# EAGLE board MM-Qwiic-Carrier-2x1-Panel (EAGLE 9.6.2), part 1 of 2
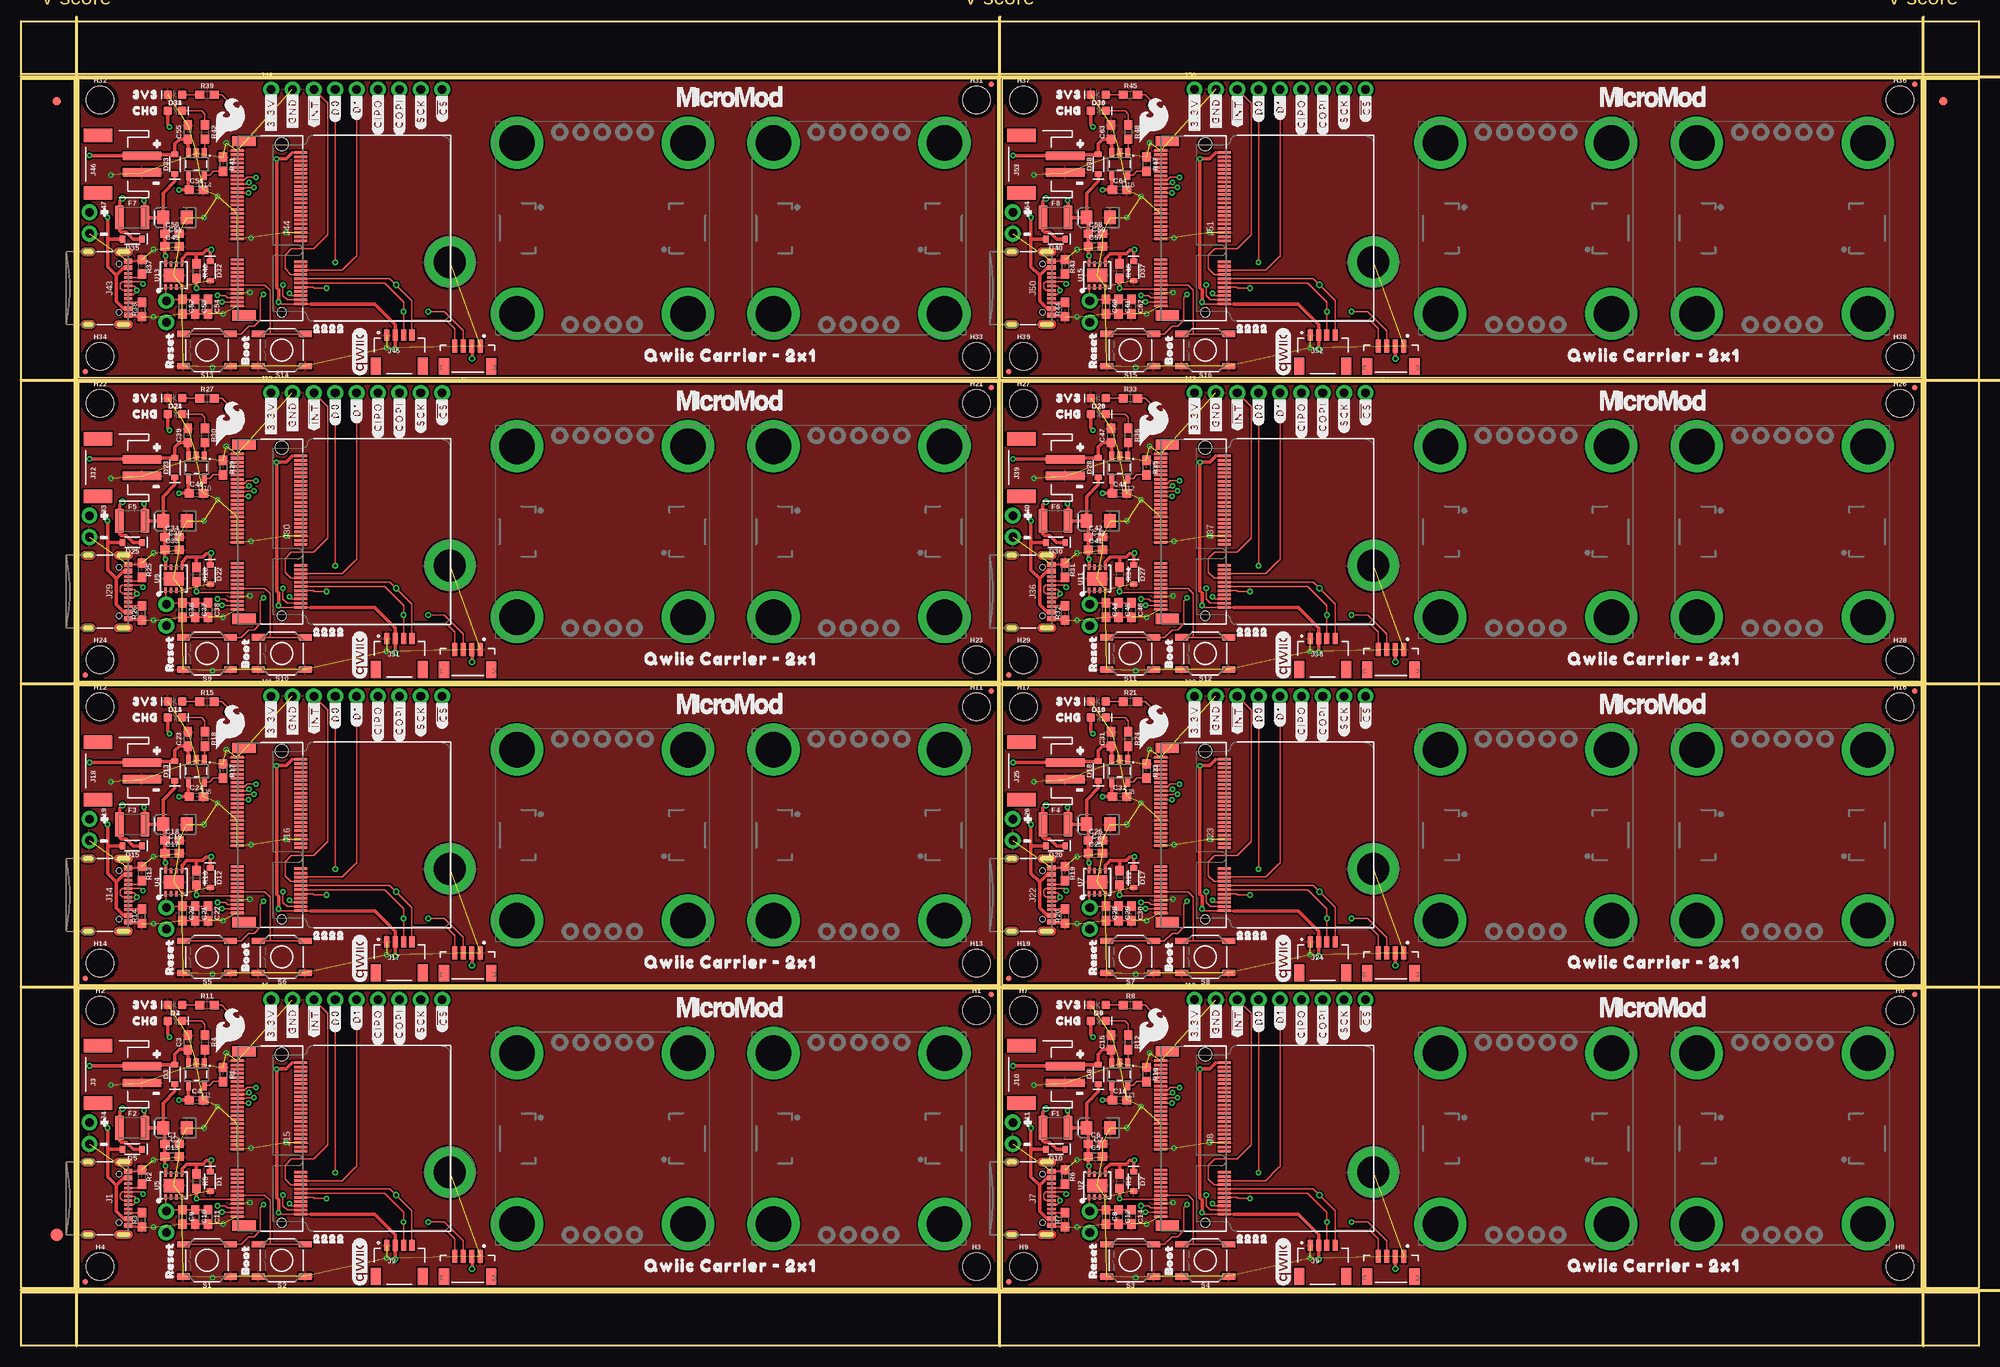
[diagram p0: board, top side]
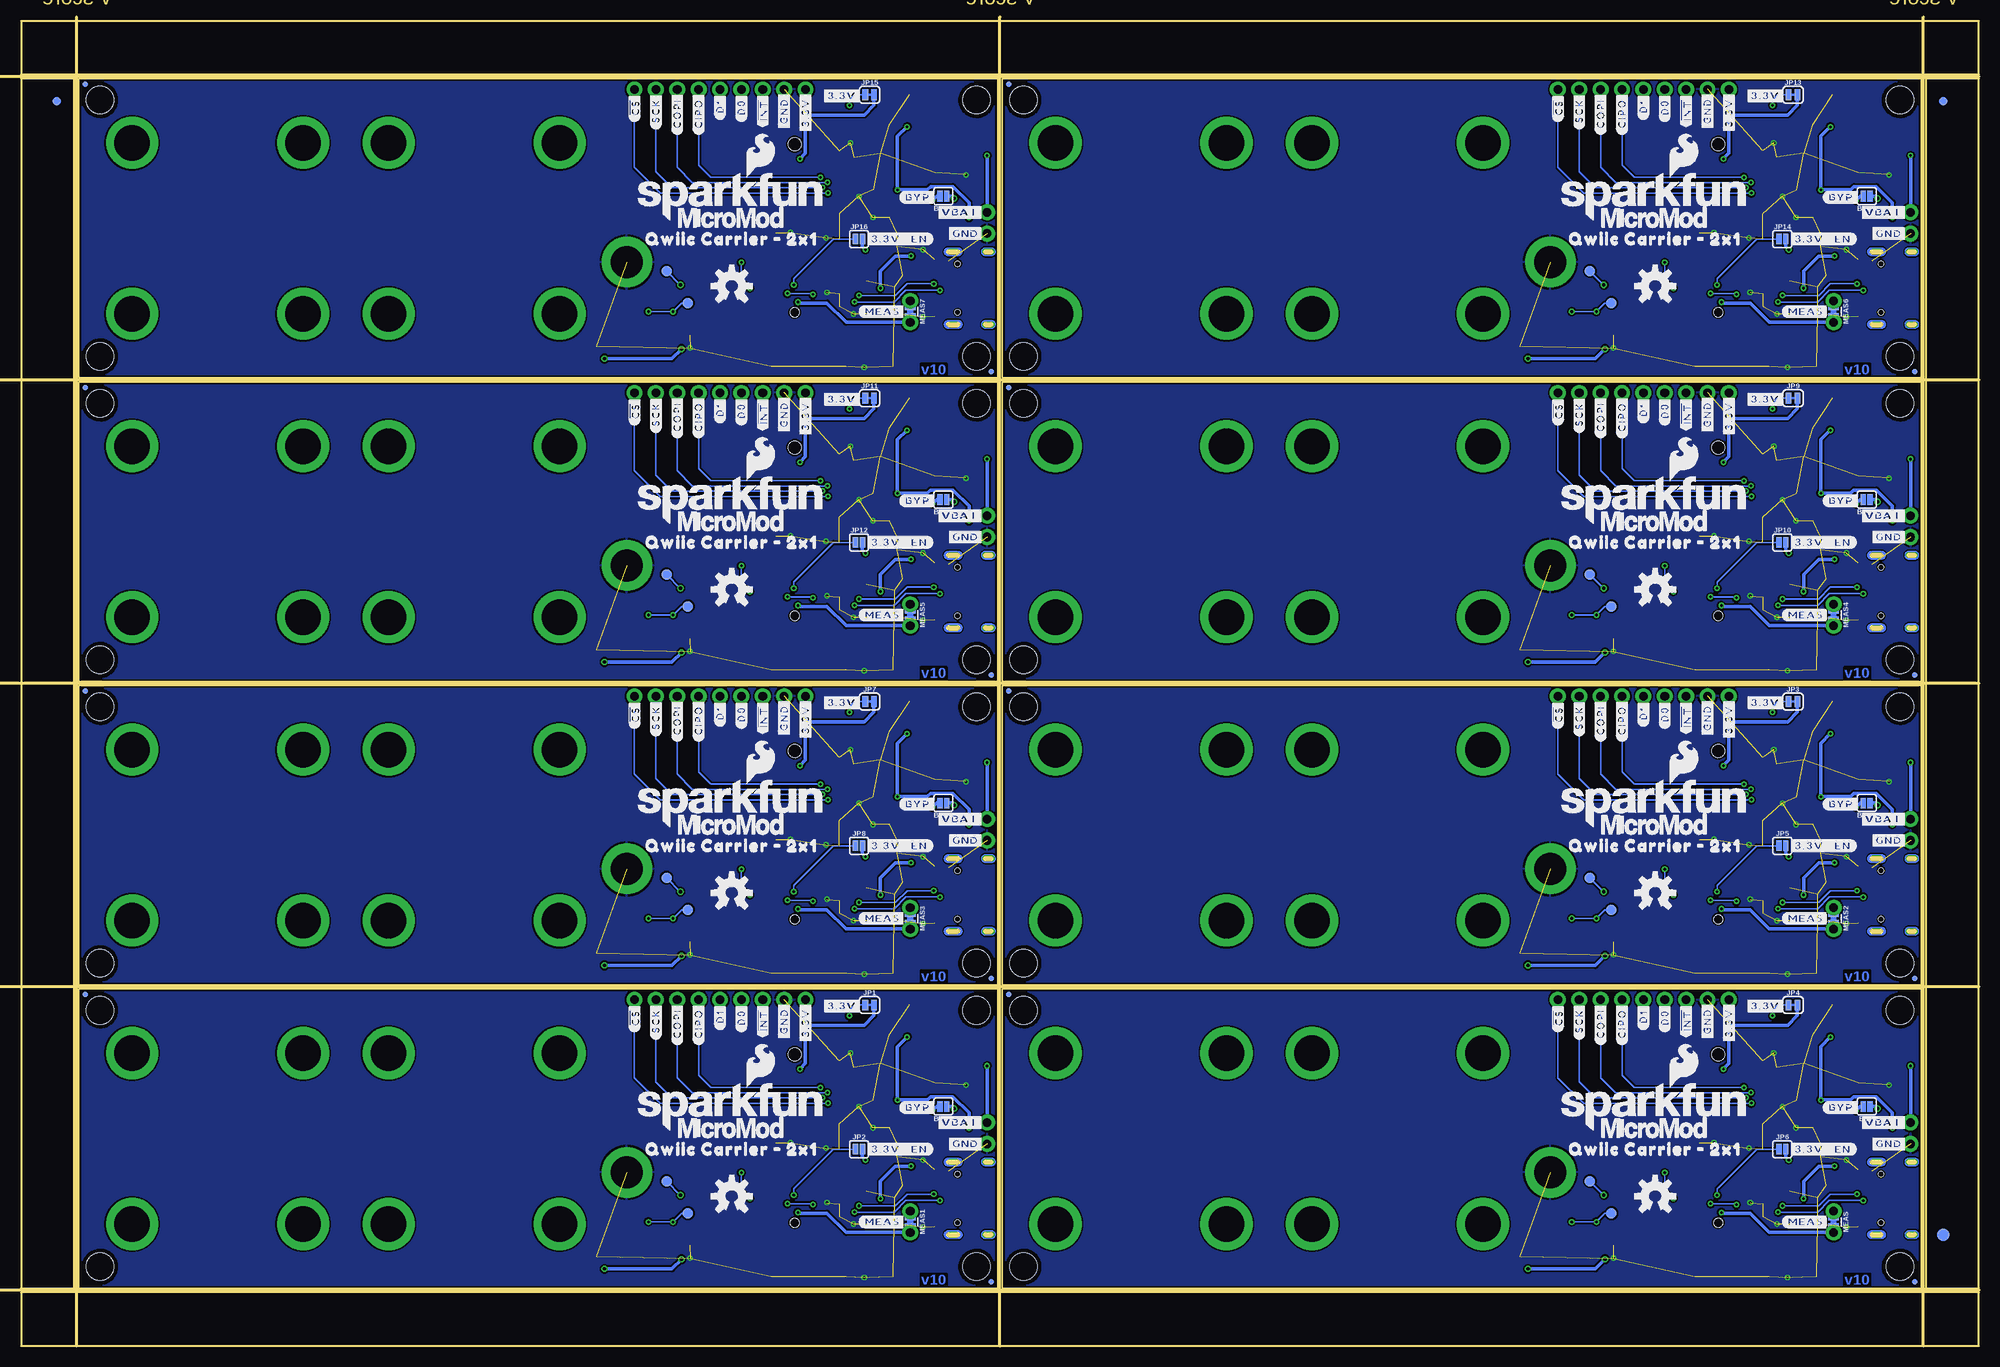
[diagram p1: board, bottom side, seen from below]

Size 232.66 x 157.48 mm. Coordinates in mm from the lower left corner, seen from the top.
Outline: 6.86,6.86 6.86,42.42 116.08,42.42 116.08,6.86 6.86,6.86
Outline: 116.59,6.86 116.59,42.42 225.81,42.42 225.81,6.86 116.59,6.86
Outline: 6.86,42.93 6.86,78.49 116.08,78.49 116.08,42.93 6.86,42.93
Outline: 116.59,42.93 116.59,78.49 225.81,78.49 225.81,42.93 116.59,42.93
Outline: 6.86,78.99 6.86,114.55 116.08,114.55 116.08,78.99 6.86,78.99
Outline: 116.59,78.99 116.59,114.55 225.81,114.55 225.81,78.99 116.59,78.99
Outline: 6.86,115.06 6.86,150.62 116.08,150.62 116.08,115.06 6.86,115.06
Outline: 116.59,115.06 116.59,150.62 225.81,150.62 225.81,115.06 116.59,115.06
Outline: 0,6.35 232.66,6.35 232.66,0 0,0 0,6.35
Outline: 226.31,150.62 232.66,150.62 232.66,6.86 226.31,6.86 226.31,150.62
Outline: 0,157.48 232.66,157.48 232.66,151.13 0,151.13 0,157.48
Outline: 0,150.62 6.35,150.62 6.35,6.86 0,6.86 0,150.62
Copper layers (1*16): Top 0.035mm / dielectric 1.5mm / Bottom 0.035mm
Design rules "MM-Qwiic-Carrier-2x1": minimum track width 7mil, minimum drill 12mil, track to track 7mil, track to pad 7mil, pad to pad 7mil, via to via 7mil, smd to smd 7mil, copper to edge 7mil, drill to drill 7mil, minimum pad ring 7mil, minimum via ring 7mil, stop-mask expansion 4mil, vias tented up to drill 25mil, thermal gap 10mil
Net classes: 0 default: width 0 mm, drill 0 mm
Milling: 8 lines

## Footprints (pad centres in the part's own frame; a part is rotated, then mirrored left to right if it is on the bottom)
SMT-JUMPER_2_NO_SILK = smd 0.635 x 1.27: 1 -0.406,0; 2 0.406,0
0603 = smd 1.1 x 1: 1 -0.85,0; 2 0.85,0
EIA3216 = smd 1.4 x 1.6: + 1.4,0; - -1.4,0
SOD-323 = smd 0.63 x 0.83: A 1.15,0; C -1.15,0
LED-0603 = smd 1 x 1: A -0.877,0; C 0.877,0
FIDUCIAL-1X2 = smd 1 x 1: 1 0,0
FIDUCIAL-1.5X3 = smd 1.5 x 1.5: 1 0,0
1210 = smd 1 x 2.8: 1 -1.5,0; 2 1.5,0
FIDUCIAL-MICRO = smd 0.635 x 0.635: 1 0,0
STAND-OFF = hole 3.302: 0,0
STAND-OFF-REFLOW-M2.5 = drill 3.8 pad 6: 1 0,0
USB-C-16P-2LAYER-PADS = smd 0.3 x 1: A5 -1.25,-0.34; A6 -0.25,-0.34; A7 0.25,-0.34; A8 1.25,-0.34; B5 1.75,-0.34; B6 0.75,-0.34; B7 -0.75,-0.34; B8 -1.75,-0.34 | smd 0.6 x 1: GND -3.225,-0.34; GND2 3.225,-0.34; VBUS1 -2.45,-0.34; VBUS2 2.45,-0.34 | drill 0.4 pad 0.6 long: SHLD1 -4.318,-0.915; SHLD2 4.318,-0.915; SHLD3 -4.318,-5.095; SHLD4 4.318,-5.095 | hole 0.65: -2.89,-1.445; 2.89,-1.445
JST04_1MM_RA = smd 0.6 x 1.35: 1 -1.5,0; 2 -0.5,0; 3 0.5,0; 4 1.5,0 | smd 1.2 x 2: NC1 2.8,-3.675; NC2 -2.8,-3.675
JST-2-SMD = smd 1 x 4.6: 1 -1,-3.7; 2 1,-3.7 | smd 1.6 x 3.4: NC1 -3.4,1.5; NC2 3.4,1.5
1X02_NO_SILK = drill 1.016 pad 1.88: 1 0,0; 2 2.54,0
JST04_1MM_VERT = smd 0.6 x 1.55: 1 -1.478,0.775; 2 -0.478,0.775; 3 0.522,0.775; 4 1.522,0.775 | smd 1.2 x 2: NC1 -2.778,3.2; NC2 2.822,3.2
1X09_NO_SILK = drill 1.016 pad 1.88: 1 0,0; 2 2.54,0; 3 5.08,0; 4 7.62,0; 5 10.16,0; 6 12.7,0; 7 15.24,0; 8 17.78,0; 9 20.32,0
M.2-CONNECTOR-E = smd 0.3 x 1.55: 1 9.25,-5.275; 2 9,2.275; 3 8.75,-5.275; 4 8.5,2.275; 5 8.25,-5.275; 6 8,2.275; 7 7.75,-5.275; 8 7.5,2.275; 9 7.25,-5.275; 10 7,2.275; 11 6.75,-5.275; 12 6.5,2.275; 13 6.25,-5.275; 14 6,2.275; 15 5.75,-5.275; 16 5.5,2.275; 17 5.25,-5.275; 18 5,2.275; 19 4.75,-5.275; 20 4.5,2.275; 21 4.25,-5.275; 22 4,2.275; 23 3.75,-5.275; 32 1.5,2.275; 33 1.25,-5.275; 34 1,2.275; 35 0.75,-5.275; 36 0.5,2.275; 37 0.25,-5.275; 38 0,2.275; 39 -0.25,-5.275; 40 -0.5,2.275; 41 -0.75,-5.275; 42 -1,2.275; 43 -1.25,-5.275; 44 -1.5,2.275; 45 -1.75,-5.275; 46 -2,2.275; 47 -2.25,-5.275; 48 -2.5,2.275; 49 -2.75,-5.275; 50 -3,2.275; 51 -3.25,-5.275; 52 -3.5,2.275; 53 -3.75,-5.275; 54 -4,2.275; 55 -4.25,-5.275; 56 -4.5,2.275; 57 -4.75,-5.275; 58 -5,2.275; 59 -5.25,-5.275; 60 -5.5,2.275; 61 -5.75,-5.275; 62 -6,2.275; 63 -6.25,-5.275; 64 -6.5,2.275; 65 -6.75,-5.275; 66 -7,2.275; 67 -7.25,-5.275; 68 -7.5,2.275; 69 -7.75,-5.275; 70 -8,2.275; 71 -8.25,-5.275; 72 -8.5,2.275; 73 -8.75,-5.275; 74 -9,2.275; 75 -9.25,-5.275 | smd 1.2 x 2.75: A1 10.35,-4.5; A2 -10.35,-4.5 | hole 1.1: 10,0 | hole 1.6: -10,0
SMT-JUMPER_2_NC_TRACE_SILK = smd 0.66 x 1.27: 1 -0.521,0; 2 0.521,0
COMBO-JUMPER_2_NC_TRACE = smd 0.635 x 1.27: 1 -0.508,0; 2 0.508,0 | drill 1.016 pad 1.88: 3 -1.27,0; 4 1.27,0
TACTILE_SWITCH_SMD_5.2MM = smd 1.524 x 0.762: 1 -2.794,1.905; 2 2.794,1.905; 3 -2.794,-1.905; 4 2.794,-1.905
PAD.03X.05 = smd 1.27 x 1.27: P$1 0,0
SOT23-5 = smd 0.55 x 1.2: 1 -0.95,-1.3; 2 0,-1.3; 3 0.95,-1.3; 4 0.95,1.3; 5 -0.95,1.3
UDFN-8 = smd 0.3 x 0.65: 1 -0.975,-1.375; 2 -0.325,-1.375; 3 0.325,-1.375; 4 0.975,-1.375; 5 0.975,1.375; 6 0.325,1.375; 7 -0.325,1.375; 8 -0.975,1.375 | smd 2.35 x 1.6: EP 0,0
QWIIC_BOARD_MOUNT_SMD_STANDOFFS = drill 4.216 pad 6.198: 1 -10.16,10.16; 2 10.16,10.16; 3 -10.16,-10.16; 4 10.16,-10.16

## Placement (x,y rotation side)
BYP  JUMPER-SMT_2_NO_SILK  [SMT-JUMPER_2_NO_SILK]  13.34,28.45 180 bottom
BYP1  JUMPER-SMT_2_NO_SILK  [SMT-JUMPER_2_NO_SILK]  123.06,28.45 180 bottom
BYP2  JUMPER-SMT_2_NO_SILK  [SMT-JUMPER_2_NO_SILK]  13.34,64.52 180 bottom
BYP3  JUMPER-SMT_2_NO_SILK  [SMT-JUMPER_2_NO_SILK]  123.06,64.52 180 bottom
BYP4  JUMPER-SMT_2_NO_SILK  [SMT-JUMPER_2_NO_SILK]  13.34,100.58 180 bottom
BYP5  JUMPER-SMT_2_NO_SILK  [SMT-JUMPER_2_NO_SILK]  123.06,100.58 180 bottom
BYP6  JUMPER-SMT_2_NO_SILK  [SMT-JUMPER_2_NO_SILK]  13.34,136.65 180 bottom
BYP7  JUMPER-SMT_2_NO_SILK  [SMT-JUMPER_2_NO_SILK]  123.06,136.65 180 bottom
C1  0.1uF  [0603]  17.95,24 0 top
C2  10uF  [EIA3216]  18.29,25.91 180 top
C3  4.7uF  [0603]  19.81,36.07 90 top
C4  4.7uF  [0603]  20.83,29.21 0 top
C5  0.22uF  [0603]  127.67,22.48 0 top
C6  0.1uF  [0603]  127.67,24 0 top
C7  10uF  [EIA3216]  128.02,25.91 180 top
C8  10uF  [0603]  128.91,15.33 270 top
C9  10uF  [0603]  19.18,15.33 270 top
C10  1.0uF  [0603]  20.7,15.33 270 top
C11  0.22uF  [0603]  22.23,15.33 270 top
C12  1.0uF  [0603]  130.43,15.33 270 top
C13  0.22uF  [0603]  17.95,22.48 0 top
C14  0.22uF  [0603]  131.95,15.33 270 top
C15  4.7uF  [0603]  129.54,36.07 90 top
C16  4.7uF  [0603]  130.56,29.21 0 top
C17  0.22uF  [0603]  17.95,58.55 0 top
C18  0.1uF  [0603]  17.95,60.07 0 top
C19  10uF  [EIA3216]  18.29,61.98 180 top
C20  10uF  [0603]  19.18,51.4 270 top
C21  1.0uF  [0603]  20.7,51.4 270 top
C22  0.22uF  [0603]  22.23,51.4 270 top
C23  4.7uF  [0603]  19.81,72.14 90 top
C24  4.7uF  [0603]  20.83,65.28 0 top
C25  0.22uF  [0603]  127.67,58.55 0 top
C26  0.1uF  [0603]  127.67,60.07 0 top
C27  10uF  [EIA3216]  128.02,61.98 180 top
C28  10uF  [0603]  128.91,51.4 270 top
C29  1.0uF  [0603]  130.43,51.4 270 top
C30  0.22uF  [0603]  131.95,51.4 270 top
C31  4.7uF  [0603]  129.54,72.14 90 top
C32  4.7uF  [0603]  130.56,65.28 0 top
C33  0.22uF  [0603]  17.95,94.62 0 top
C34  0.1uF  [0603]  17.95,96.14 0 top
C35  10uF  [EIA3216]  18.29,98.04 180 top
C36  10uF  [0603]  19.18,87.46 270 top
C37  1.0uF  [0603]  20.7,87.46 270 top
C38  0.22uF  [0603]  22.23,87.46 270 top
C39  4.7uF  [0603]  19.81,108.2 90 top
C40  4.7uF  [0603]  20.83,101.35 0 top
C41  0.22uF  [0603]  127.67,94.62 0 top
C42  0.1uF  [0603]  127.67,96.14 0 top
C43  10uF  [EIA3216]  128.02,98.04 180 top
C44  10uF  [0603]  128.91,87.46 270 top
C45  1.0uF  [0603]  130.43,87.46 270 top
C46  0.22uF  [0603]  131.95,87.46 270 top
C47  4.7uF  [0603]  129.54,108.2 90 top
C48  4.7uF  [0603]  130.56,101.35 0 top
C49  0.22uF  [0603]  17.95,130.68 0 top
C50  0.1uF  [0603]  17.95,132.21 0 top
C51  10uF  [EIA3216]  18.29,134.11 180 top
C52  10uF  [0603]  19.18,123.53 270 top
C53  1.0uF  [0603]  20.7,123.53 270 top
C54  0.22uF  [0603]  22.23,123.53 270 top
C55  4.7uF  [0603]  19.81,144.27 90 top
C56  4.7uF  [0603]  20.83,137.41 0 top
C57  0.22uF  [0603]  127.67,130.68 0 top
C58  0.1uF  [0603]  127.67,132.21 0 top
C59  10uF  [EIA3216]  128.02,134.11 180 top
C60  10uF  [0603]  128.91,123.53 270 top
C61  1.0uF  [0603]  130.43,123.53 270 top
C62  0.22uF  [0603]  131.95,123.53 270 top
C63  4.7uF  [0603]  129.54,144.27 90 top
C64  4.7uF  [0603]  130.56,137.41 0 top
D1  3.3V  [SOD-323]  22.48,19.56 270 top
D2  RED  [LED-0603]  18.29,40.51 180 top
D3  3A/10V/280mV  [SOD-323]  18.29,32.26 90 top
D4  Yellow  [LED-0603]  18.29,38.61 0 top
D5  3A/10V/280mV  [SOD-323]  13.21,23.37 180 top
D6  RED  [LED-0603]  128.02,40.51 180 top
D7  3.3V  [SOD-323]  132.21,19.56 270 top
D8  3A/10V/280mV  [SOD-323]  128.02,32.26 90 top
D9  Yellow  [LED-0603]  128.02,38.61 0 top
D10  3A/10V/280mV  [SOD-323]  122.94,23.37 180 top
D11  RED  [LED-0603]  18.29,76.58 180 top
D12  3.3V  [SOD-323]  22.48,55.63 270 top
D13  3A/10V/280mV  [SOD-323]  18.29,68.33 90 top
D14  Yellow  [LED-0603]  18.29,74.68 0 top
D15  3A/10V/280mV  [SOD-323]  13.21,59.44 180 top
D16  RED  [LED-0603]  128.02,76.58 180 top
D17  3.3V  [SOD-323]  132.21,55.63 270 top
D18  3A/10V/280mV  [SOD-323]  128.02,68.33 90 top
D19  Yellow  [LED-0603]  128.02,74.68 0 top
D20  3A/10V/280mV  [SOD-323]  122.94,59.44 180 top
D21  RED  [LED-0603]  18.29,112.65 180 top
D22  3.3V  [SOD-323]  22.48,91.69 270 top
D23  3A/10V/280mV  [SOD-323]  18.29,104.39 90 top
D24  Yellow  [LED-0603]  18.29,110.74 0 top
D25  3A/10V/280mV  [SOD-323]  13.21,95.5 180 top
D26  RED  [LED-0603]  128.02,112.65 180 top
D27  3.3V  [SOD-323]  132.21,91.69 270 top
D28  3A/10V/280mV  [SOD-323]  128.02,104.39 90 top
D29  Yellow  [LED-0603]  128.02,110.74 0 top
D30  3A/10V/280mV  [SOD-323]  122.94,95.5 180 top
D31  RED  [LED-0603]  18.29,148.72 180 top
D32  3.3V  [SOD-323]  22.48,127.76 270 top
D33  3A/10V/280mV  [SOD-323]  18.29,140.46 90 top
D34  Yellow  [LED-0603]  18.29,146.81 0 top
D35  3A/10V/280mV  [SOD-323]  13.21,131.57 180 top
D36  RED  [LED-0603]  128.02,148.72 180 top
D37  3.3V  [SOD-323]  132.21,127.76 270 top
D38  3A/10V/280mV  [SOD-323]  128.02,140.46 90 top
D39  Yellow  [LED-0603]  128.02,146.81 0 top
D40  3A/10V/280mV  [SOD-323]  122.94,131.57 180 top
E$1  [FIDUCIAL-1X2]  4.23,147.96 0 top
E$2  [FIDUCIAL-1X2]  4.23,147.96 0 bottom
E$3  [FIDUCIAL-1X2]  228.43,147.96 0 top
E$4  [FIDUCIAL-1X2]  228.43,147.96 0 bottom
E$5  [FIDUCIAL-1.5X3]  4.23,13.21 0 top
E$6  [FIDUCIAL-1.5X3]  4.23,13.21 0 bottom
F1  6V/2A  [1210]  122.94,25.91 0 top
F2  6V/2A  [1210]  13.21,25.91 0 top
F3  6V/2A  [1210]  13.21,61.98 0 top
F4  6V/2A  [1210]  122.94,61.98 0 top
F5  6V/2A  [1210]  13.21,98.04 0 top
F6  6V/2A  [1210]  122.94,98.04 0 top
F7  6V/2A  [1210]  13.21,134.11 0 top
F8  6V/2A  [1210]  122.94,134.11 0 top
FD1  FIDUCIALUFIDUCIAL  [FIDUCIAL-MICRO]  7.62,7.62 0 top
FD2  FIDUCIALUFIDUCIAL  [FIDUCIAL-MICRO]  115.32,41.78 0 top
FD3  FIDUCIALUFIDUCIAL  [FIDUCIAL-MICRO]  7.62,7.62 0 bottom
FD4  FIDUCIALUFIDUCIAL  [FIDUCIAL-MICRO]  115.32,41.78 0 bottom
FD5  FIDUCIALUFIDUCIAL  [FIDUCIAL-MICRO]  117.35,7.62 0 top
FD6  FIDUCIALUFIDUCIAL  [FIDUCIAL-MICRO]  225.04,41.78 0 top
FD7  FIDUCIALUFIDUCIAL  [FIDUCIAL-MICRO]  117.35,7.62 0 bottom
FD8  FIDUCIALUFIDUCIAL  [FIDUCIAL-MICRO]  225.04,41.78 0 bottom
FD9  FIDUCIALUFIDUCIAL  [FIDUCIAL-MICRO]  7.62,43.69 0 top
FD10  FIDUCIALUFIDUCIAL  [FIDUCIAL-MICRO]  115.32,77.85 0 top
FD11  FIDUCIALUFIDUCIAL  [FIDUCIAL-MICRO]  7.62,43.69 0 bottom
FD12  FIDUCIALUFIDUCIAL  [FIDUCIAL-MICRO]  115.32,77.85 0 bottom
FD13  FIDUCIALUFIDUCIAL  [FIDUCIAL-MICRO]  117.35,43.69 0 top
FD14  FIDUCIALUFIDUCIAL  [FIDUCIAL-MICRO]  225.04,77.85 0 top
FD15  FIDUCIALUFIDUCIAL  [FIDUCIAL-MICRO]  117.35,43.69 0 bottom
FD16  FIDUCIALUFIDUCIAL  [FIDUCIAL-MICRO]  225.04,77.85 0 bottom
FD17  FIDUCIALUFIDUCIAL  [FIDUCIAL-MICRO]  7.62,79.76 0 top
FD18  FIDUCIALUFIDUCIAL  [FIDUCIAL-MICRO]  115.32,113.92 0 top
FD19  FIDUCIALUFIDUCIAL  [FIDUCIAL-MICRO]  7.62,79.76 0 bottom
FD20  FIDUCIALUFIDUCIAL  [FIDUCIAL-MICRO]  115.32,113.92 0 bottom
FD21  FIDUCIALUFIDUCIAL  [FIDUCIAL-MICRO]  117.35,79.76 0 top
FD22  FIDUCIALUFIDUCIAL  [FIDUCIAL-MICRO]  225.04,113.92 0 top
FD23  FIDUCIALUFIDUCIAL  [FIDUCIAL-MICRO]  117.35,79.76 0 bottom
FD24  FIDUCIALUFIDUCIAL  [FIDUCIAL-MICRO]  225.04,113.92 0 bottom
FD25  FIDUCIALUFIDUCIAL  [FIDUCIAL-MICRO]  7.62,115.82 0 top
FD26  FIDUCIALUFIDUCIAL  [FIDUCIAL-MICRO]  115.32,149.99 0 top
FD27  FIDUCIALUFIDUCIAL  [FIDUCIAL-MICRO]  7.62,115.82 0 bottom
FD28  FIDUCIALUFIDUCIAL  [FIDUCIAL-MICRO]  115.32,149.99 0 bottom
FD29  FIDUCIALUFIDUCIAL  [FIDUCIAL-MICRO]  117.35,115.82 0 top
FD30  FIDUCIALUFIDUCIAL  [FIDUCIAL-MICRO]  225.04,149.99 0 top
FD31  FIDUCIALUFIDUCIAL  [FIDUCIAL-MICRO]  117.35,115.82 0 bottom
FD32  FIDUCIALUFIDUCIAL  [FIDUCIAL-MICRO]  225.04,149.99 0 bottom
H1  STAND-OFF  [STAND-OFF]  113.54,39.88 0 top
H2  STAND-OFF  [STAND-OFF]  9.4,39.88 0 top
H3  STAND-OFF  [STAND-OFF]  113.54,9.4 0 top
H4  STAND-OFF  [STAND-OFF]  9.4,9.4 0 top
H5  STAND-OFF-REFLOW2.5MM_TALL  [STAND-OFF-REFLOW-M2.5]  50.93,20.62 0 top
H6  STAND-OFF  [STAND-OFF]  223.27,39.88 0 top
H7  STAND-OFF  [STAND-OFF]  119.13,39.88 0 top
H8  STAND-OFF  [STAND-OFF]  223.27,9.4 0 top
H9  STAND-OFF  [STAND-OFF]  119.13,9.4 0 top
H10  STAND-OFF-REFLOW2.5MM_TALL  [STAND-OFF-REFLOW-M2.5]  160.66,20.62 0 top
H11  STAND-OFF  [STAND-OFF]  113.54,75.95 0 top
H12  STAND-OFF  [STAND-OFF]  9.4,75.95 0 top
H13  STAND-OFF  [STAND-OFF]  113.54,45.47 0 top
H14  STAND-OFF  [STAND-OFF]  9.4,45.47 0 top
H15  STAND-OFF-REFLOW2.5MM_TALL  [STAND-OFF-REFLOW-M2.5]  50.93,56.69 0 top
H16  STAND-OFF  [STAND-OFF]  223.27,75.95 0 top
H17  STAND-OFF  [STAND-OFF]  119.13,75.95 0 top
H18  STAND-OFF  [STAND-OFF]  223.27,45.47 0 top
H19  STAND-OFF  [STAND-OFF]  119.13,45.47 0 top
H20  STAND-OFF-REFLOW2.5MM_TALL  [STAND-OFF-REFLOW-M2.5]  160.66,56.69 0 top
H21  STAND-OFF  [STAND-OFF]  113.54,112.01 0 top
H22  STAND-OFF  [STAND-OFF]  9.4,112.01 0 top
H23  STAND-OFF  [STAND-OFF]  113.54,81.53 0 top
H24  STAND-OFF  [STAND-OFF]  9.4,81.53 0 top
H25  STAND-OFF-REFLOW2.5MM_TALL  [STAND-OFF-REFLOW-M2.5]  50.93,92.75 0 top
H26  STAND-OFF  [STAND-OFF]  223.27,112.01 0 top
H27  STAND-OFF  [STAND-OFF]  119.13,112.01 0 top
H28  STAND-OFF  [STAND-OFF]  223.27,81.53 0 top
H29  STAND-OFF  [STAND-OFF]  119.13,81.53 0 top
H30  STAND-OFF-REFLOW2.5MM_TALL  [STAND-OFF-REFLOW-M2.5]  160.66,92.75 0 top
H31  STAND-OFF  [STAND-OFF]  113.54,148.08 0 top
H32  STAND-OFF  [STAND-OFF]  9.4,148.08 0 top
H33  STAND-OFF  [STAND-OFF]  113.54,117.6 0 top
H34  STAND-OFF  [STAND-OFF]  9.4,117.6 0 top
H35  STAND-OFF-REFLOW2.5MM_TALL  [STAND-OFF-REFLOW-M2.5]  50.93,128.82 0 top
H36  STAND-OFF  [STAND-OFF]  223.27,148.08 0 top
H37  STAND-OFF  [STAND-OFF]  119.13,148.08 0 top
H38  STAND-OFF  [STAND-OFF]  223.27,117.6 0 top
H39  STAND-OFF  [STAND-OFF]  119.13,117.6 0 top
H40  STAND-OFF-REFLOW2.5MM_TALL  [STAND-OFF-REFLOW-M2.5]  160.66,128.82 0 top
J1  [USB-C-16P-2LAYER-PADS]  13.08,17.53 270 top
J2  QWIIC_RIGHT_ANGLE  [JST04_1MM_RA]  44.96,11.94 0 top
J3  [JST-2-SMD]  10.67,32.26 90 top
J4  [1X02_NO_SILK]  8.13,26.54 270 top
J5  Vertical Qwiic Connector  [JST04_1MM_VERT]  53.09,11.43 180 top
J6  [1X09_NO_SILK]  29.72,41.15 0 top
J7  [USB-C-16P-2LAYER-PADS]  122.81,17.53 270 top
J8  MICROMOD-2222-C  [M.2-CONNECTOR-E]  140.72,24.64 270 top
J9  QWIIC_RIGHT_ANGLE  [JST04_1MM_RA]  154.69,11.94 0 top
J10  [JST-2-SMD]  120.4,32.26 90 top
J11  [1X02_NO_SILK]  117.86,26.54 270 top
J12  Vertical Qwiic Connector  [JST04_1MM_VERT]  162.81,11.43 180 top
J13  [1X09_NO_SILK]  139.45,41.15 0 top
J14  [USB-C-16P-2LAYER-PADS]  13.08,53.59 270 top
J15  MICROMOD-2222-C  [M.2-CONNECTOR-E]  30.99,24.64 270 top
J16  MICROMOD-2222-C  [M.2-CONNECTOR-E]  30.99,60.71 270 top
J17  QWIIC_RIGHT_ANGLE  [JST04_1MM_RA]  44.96,48.01 0 top
J18  [JST-2-SMD]  10.67,68.33 90 top
J19  [1X02_NO_SILK]  8.13,62.61 270 top
J20  Vertical Qwiic Connector  [JST04_1MM_VERT]  53.09,47.5 180 top
J21  [1X09_NO_SILK]  29.72,77.22 0 top
J22  [USB-C-16P-2LAYER-PADS]  122.81,53.59 270 top
J23  MICROMOD-2222-C  [M.2-CONNECTOR-E]  140.72,60.71 270 top
J24  QWIIC_RIGHT_ANGLE  [JST04_1MM_RA]  154.69,48.01 0 top
J25  [JST-2-SMD]  120.4,68.33 90 top
J26  [1X02_NO_SILK]  117.86,62.61 270 top
J27  Vertical Qwiic Connector  [JST04_1MM_VERT]  162.81,47.5 180 top
J28  [1X09_NO_SILK]  139.45,77.22 0 top
J29  [USB-C-16P-2LAYER-PADS]  13.08,89.66 270 top
J30  MICROMOD-2222-C  [M.2-CONNECTOR-E]  30.99,96.77 270 top
J31  QWIIC_RIGHT_ANGLE  [JST04_1MM_RA]  44.96,84.07 0 top
J32  [JST-2-SMD]  10.67,104.39 90 top
J33  [1X02_NO_SILK]  8.13,98.68 270 top
J34  Vertical Qwiic Connector  [JST04_1MM_VERT]  53.09,83.57 180 top
J35  [1X09_NO_SILK]  29.72,113.28 0 top
J36  [USB-C-16P-2LAYER-PADS]  122.81,89.66 270 top
J37  MICROMOD-2222-C  [M.2-CONNECTOR-E]  140.72,96.77 270 top
J38  QWIIC_RIGHT_ANGLE  [JST04_1MM_RA]  154.69,84.07 0 top
J39  [JST-2-SMD]  120.4,104.39 90 top
J40  [1X02_NO_SILK]  117.86,98.68 270 top
J41  Vertical Qwiic Connector  [JST04_1MM_VERT]  162.81,83.57 180 top
J42  [1X09_NO_SILK]  139.45,113.28 0 top
J43  [USB-C-16P-2LAYER-PADS]  13.08,125.73 270 top
J44  MICROMOD-2222-C  [M.2-CONNECTOR-E]  30.99,132.84 270 top
J45  QWIIC_RIGHT_ANGLE  [JST04_1MM_RA]  44.96,120.14 0 top
J46  [JST-2-SMD]  10.67,140.46 90 top
J47  [1X02_NO_SILK]  8.13,134.75 270 top
J48  Vertical Qwiic Connector  [JST04_1MM_VERT]  53.09,119.63 180 top
J49  [1X09_NO_SILK]  29.72,149.35 0 top
J50  [USB-C-16P-2LAYER-PADS]  122.81,125.73 270 top
J51  MICROMOD-2222-C  [M.2-CONNECTOR-E]  140.72,132.84 270 top
J52  QWIIC_RIGHT_ANGLE  [JST04_1MM_RA]  154.69,120.14 0 top
J53  [JST-2-SMD]  120.4,140.46 90 top
J54  [1X02_NO_SILK]  117.86,134.75 270 top
J55  Vertical Qwiic Connector  [JST04_1MM_VERT]  162.81,119.63 180 top
J56  [1X09_NO_SILK]  139.45,149.35 0 top
JP1  3V3 LED  [SMT-JUMPER_2_NC_TRACE_SILK]  131.83,40.51 0 bottom
JP2  VE  [SMT-JUMPER_2_NO_SILK]  133.1,23.37 0 bottom
JP3  3V3 LED  [SMT-JUMPER_2_NC_TRACE_SILK]  22.1,76.58 0 bottom
JP4  3V3 LED  [SMT-JUMPER_2_NC_TRACE_SILK]  22.1,40.51 0 bottom
JP5  VE  [SMT-JUMPER_2_NO_SILK]  23.37,59.44 0 bottom
JP6  VE  [SMT-JUMPER_2_NO_SILK]  23.37,23.37 0 bottom
JP7  3V3 LED  [SMT-JUMPER_2_NC_TRACE_SILK]  131.83,76.58 0 bottom
JP8  VE  [SMT-JUMPER_2_NO_SILK]  133.1,59.44 0 bottom
JP9  3V3 LED  [SMT-JUMPER_2_NC_TRACE_SILK]  22.1,112.65 0 bottom
JP10  VE  [SMT-JUMPER_2_NO_SILK]  23.37,95.5 0 bottom
JP11  3V3 LED  [SMT-JUMPER_2_NC_TRACE_SILK]  131.83,112.65 0 bottom
JP12  VE  [SMT-JUMPER_2_NO_SILK]  133.1,95.5 0 bottom
JP13  3V3 LED  [SMT-JUMPER_2_NC_TRACE_SILK]  22.1,148.72 0 bottom
JP14  VE  [SMT-JUMPER_2_NO_SILK]  23.37,131.57 0 bottom
JP15  3V3 LED  [SMT-JUMPER_2_NC_TRACE_SILK]  131.83,148.72 0 bottom
JP16  VE  [SMT-JUMPER_2_NO_SILK]  133.1,131.57 0 bottom
LOGO1  SFE_LOGO_NAME_FLAME.2_INCH  [SFE_LOGO_NAME_FLAME_.2]  38.61,28.45 0 bottom
LOGO2  QWIIC_LOGO_CONNECTOR  [QWIIC_5.5MM]  40.26,9.97 90 top
LOGO3  OSHW-LOGOM  [OSHW-LOGO-M]  38.48,17.78 0 bottom
LOGO4  QWIIC_LOGO_CONNECTOR  [QWIIC_5.5MM]  149.99,9.97 90 top
LOGO5  OSHW-LOGOM  [OSHW-LOGO-M]  148.21,17.78 0 bottom
LOGO6  SFE_LOGO_NAME_FLAME.2_INCH  [SFE_LOGO_NAME_FLAME_.2]  148.34,28.45 0 bottom
LOGO7  QWIIC_LOGO_CONNECTOR  [QWIIC_5.5MM]  40.26,46.04 90 top
LOGO8  OSHW-LOGOM  [OSHW-LOGO-M]  38.48,53.85 0 bottom
LOGO9  SFE_LOGO_NAME_FLAME.2_INCH  [SFE_LOGO_NAME_FLAME_.2]  38.61,64.52 0 bottom
LOGO10  QWIIC_LOGO_CONNECTOR  [QWIIC_5.5MM]  149.99,46.04 90 top
LOGO11  OSHW-LOGOM  [OSHW-LOGO-M]  148.21,53.85 0 bottom
LOGO12  SFE_LOGO_NAME_FLAME.2_INCH  [SFE_LOGO_NAME_FLAME_.2]  148.34,64.52 0 bottom
LOGO13  QWIIC_LOGO_CONNECTOR  [QWIIC_5.5MM]  40.26,82.11 90 top
LOGO14  OSHW-LOGOM  [OSHW-LOGO-M]  38.48,89.92 0 bottom
LOGO15  SFE_LOGO_NAME_FLAME.2_INCH  [SFE_LOGO_NAME_FLAME_.2]  38.61,100.58 0 bottom
LOGO16  QWIIC_LOGO_CONNECTOR  [QWIIC_5.5MM]  149.99,82.11 90 top
LOGO17  OSHW-LOGOM  [OSHW-LOGO-M]  148.21,89.92 0 bottom
LOGO18  SFE_LOGO_NAME_FLAME.2_INCH  [SFE_LOGO_NAME_FLAME_.2]  148.34,100.58 0 bottom
LOGO19  QWIIC_LOGO_CONNECTOR  [QWIIC_5.5MM]  40.26,118.17 90 top
LOGO20  OSHW-LOGOM  [OSHW-LOGO-M]  38.48,125.98 0 bottom
LOGO21  SFE_LOGO_NAME_FLAME.2_INCH  [SFE_LOGO_NAME_FLAME_.2]  38.61,136.65 0 bottom
LOGO22  QWIIC_LOGO_CONNECTOR  [QWIIC_5.5MM]  149.99,118.17 90 top
LOGO23  OSHW-LOGOM  [OSHW-LOGO-M]  148.21,125.98 0 bottom
LOGO24  SFE_LOGO_NAME_FLAME.2_INCH  [SFE_LOGO_NAME_FLAME_.2]  148.34,136.65 0 bottom
MEAS  [COMBO-JUMPER_2_NC_TRACE]  17.27,14.73 270 bottom
MEAS1  [COMBO-JUMPER_2_NC_TRACE]  127,14.73 270 bottom
MEAS2  [COMBO-JUMPER_2_NC_TRACE]  17.27,50.8 270 bottom
MEAS3  [COMBO-JUMPER_2_NC_TRACE]  127,50.8 270 bottom
MEAS4  [COMBO-JUMPER_2_NC_TRACE]  17.27,86.87 270 bottom
MEAS5  [COMBO-JUMPER_2_NC_TRACE]  127,86.87 270 bottom
MEAS6  [COMBO-JUMPER_2_NC_TRACE]  17.27,122.94 270 bottom
MEAS7  [COMBO-JUMPER_2_NC_TRACE]  127,122.94 270 bottom
R1  2.2k  [0603]  24,32.26 270 top
R2  5.1k  [0603]  14.35,20.07 270 top
R3  5.1k  [0603]  14.35,14.99 90 top
R4  1k  [0603]  21.84,36.07 270 top
R5  100k  [0603]  20.83,19.56 270 top
R6  5.1k  [0603]  124.08,20.07 270 top
R7  5.1k  [0603]  124.08,14.99 90 top
R8  1k  [0603]  131.83,40.51 0 top
R9  100k  [0603]  130.56,19.56 270 top
R10  2.2k  [0603]  133.73,32.26 270 top
R11  1k  [0603]  22.1,40.51 0 top
R12  1k  [0603]  131.57,36.07 270 top
R13  5.1k  [0603]  14.35,56.13 270 top
R14  5.1k  [0603]  14.35,51.05 90 top
R15  1k  [0603]  22.1,76.58 0 top
R16  100k  [0603]  20.83,55.63 270 top
R17  2.2k  [0603]  24,68.33 270 top
R18  1k  [0603]  21.84,72.14 270 top
R19  5.1k  [0603]  124.08,56.13 270 top
R20  5.1k  [0603]  124.08,51.05 90 top
R21  1k  [0603]  131.83,76.58 0 top
R22  100k  [0603]  130.56,55.63 270 top
R23  2.2k  [0603]  133.73,68.33 270 top
R24  1k  [0603]  131.57,72.14 270 top
R25  5.1k  [0603]  14.35,92.2 270 top
R26  5.1k  [0603]  14.35,87.12 90 top
R27  1k  [0603]  22.1,112.65 0 top
R28  100k  [0603]  20.83,91.69 270 top
R29  2.2k  [0603]  24,104.39 270 top
R30  1k  [0603]  21.84,108.2 270 top
R31  5.1k  [0603]  124.08,92.2 270 top
R32  5.1k  [0603]  124.08,87.12 90 top
R33  1k  [0603]  131.83,112.65 0 top
R34  100k  [0603]  130.56,91.69 270 top
R35  2.2k  [0603]  133.73,104.39 270 top
R36  1k  [0603]  131.57,108.2 270 top
R37  5.1k  [0603]  14.35,128.27 270 top
R38  5.1k  [0603]  14.35,123.19 90 top
R39  1k  [0603]  22.1,148.72 0 top
R40  100k  [0603]  20.83,127.76 270 top
R41  2.2k  [0603]  24,140.46 270 top
R42  1k  [0603]  21.84,144.27 270 top
R43  5.1k  [0603]  124.08,128.27 270 top
R44  5.1k  [0603]  124.08,123.19 90 top
R45  1k  [0603]  131.83,148.72 0 top
R46  100k  [0603]  130.56,127.76 270 top
R47  2.2k  [0603]  133.73,140.46 270 top
R48  1k  [0603]  131.57,144.27 270 top
S1  Reset  [TACTILE_SWITCH_SMD_5.2MM]  22.1,10.16 180 top
S2  BOOT  [TACTILE_SWITCH_SMD_5.2MM]  30.99,10.16 180 top
S3  Reset  [TACTILE_SWITCH_SMD_5.2MM]  131.83,10.16 180 top
S4  BOOT  [TACTILE_SWITCH_SMD_5.2MM]  140.72,10.16 180 top
S5  Reset  [TACTILE_SWITCH_SMD_5.2MM]  22.1,46.23 180 top
S6  BOOT  [TACTILE_SWITCH_SMD_5.2MM]  30.99,46.23 180 top
S7  Reset  [TACTILE_SWITCH_SMD_5.2MM]  131.83,46.23 180 top
S8  BOOT  [TACTILE_SWITCH_SMD_5.2MM]  140.72,46.23 180 top
S9  Reset  [TACTILE_SWITCH_SMD_5.2MM]  22.1,82.3 180 top
S10  BOOT  [TACTILE_SWITCH_SMD_5.2MM]  30.99,82.3 180 top
S11  Reset  [TACTILE_SWITCH_SMD_5.2MM]  131.83,82.3 180 top
S12  BOOT  [TACTILE_SWITCH_SMD_5.2MM]  140.72,82.3 180 top
S13  Reset  [TACTILE_SWITCH_SMD_5.2MM]  22.1,118.36 180 top
S14  BOOT  [TACTILE_SWITCH_SMD_5.2MM]  30.99,118.36 180 top
S15  Reset  [TACTILE_SWITCH_SMD_5.2MM]  131.83,118.36 180 top
S16  BOOT  [TACTILE_SWITCH_SMD_5.2MM]  140.72,118.36 180 top
TP1  TEST-POINT3X5  [PAD.03X.05]  43.69,15.75 0 bottom
TP2  TEST-POINT3X5  [PAD.03X.05]  46.23,19.56 0 bottom
TP3  TEST-POINT3X5  [PAD.03X.05]  153.42,15.75 0 bottom
TP4  TEST-POINT3X5  [PAD.03X.05]  155.96,19.56 0 bottom
TP5  TEST-POINT3X5  [PAD.03X.05]  43.69,51.82 0 bottom
TP6  TEST-POINT3X5  [PAD.03X.05]  46.23,55.63 0 bottom
TP7  TEST-POINT3X5  [PAD.03X.05]  153.42,51.82 0 bottom
TP8  TEST-POINT3X5  [PAD.03X.05]  155.96,55.63 0 bottom
TP9  TEST-POINT3X5  [PAD.03X.05]  43.69,87.88 0 bottom
TP10  TEST-POINT3X5  [PAD.03X.05]  46.23,91.69 0 bottom
TP11  TEST-POINT3X5  [PAD.03X.05]  153.42,87.88 0 bottom
TP12  TEST-POINT3X5  [PAD.03X.05]  155.96,91.69 0 bottom
TP13  TEST-POINT3X5  [PAD.03X.05]  43.69,123.95 0 bottom
TP14  TEST-POINT3X5  [PAD.03X.05]  46.23,127.76 0 bottom
TP15  TEST-POINT3X5  [PAD.03X.05]  153.42,123.95 0 bottom
TP16  TEST-POINT3X5  [PAD.03X.05]  155.96,127.76 0 bottom
U1  MCP73831  [SOT23-5]  20.83,32.26 180 top
U2  AP7361C-33FGEUDFN-8  [UDFN-8]  127.89,19.05 0 top
U3  MCP73831  [SOT23-5]  130.56,32.26 180 top
U4  AP7361C-33FGEUDFN-8  [UDFN-8]  18.16,55.12 0 top
U5  AP7361C-33FGEUDFN-8  [UDFN-8]  18.16,19.05 0 top
U6  MCP73831  [SOT23-5]  20.83,68.33 180 top
U7  AP7361C-33FGEUDFN-8  [UDFN-8]  127.89,55.12 0 top
U8  MCP73831  [SOT23-5]  130.56,68.33 180 top
U9  AP7361C-33FGEUDFN-8  [UDFN-8]  18.16,91.19 0 top
U10  MCP73831  [SOT23-5]  20.83,104.39 180 top
U11  AP7361C-33FGEUDFN-8  [UDFN-8]  127.89,91.19 0 top
U12  MCP73831  [SOT23-5]  130.56,104.39 180 top
U13  AP7361C-33FGEUDFN-8  [UDFN-8]  18.16,127.25 0 top
U14  MCP73831  [SOT23-5]  20.83,140.46 180 top
U15  AP7361C-33FGEUDFN-8  [UDFN-8]  127.89,127.25 0 top
U16  MCP73831  [SOT23-5]  130.56,140.46 180 top
U$1  [#3#3V_EN#0]  22.61,23.37 0 bottom
U$2  QWIIC_BOARD_OUTLINESTANDOFF  [QWIIC_BOARD_MOUNT_SMD_STANDOFFS]  99.57,24.64 0 top
U$3  [3V30]  12.57,40.51 0 top
U$4  [CHG0]  12.57,38.61 0 top
U$5  QWIIC_BOARD_OUTLINESTANDOFF  [QWIIC_BOARD_MOUNT_SMD_STANDOFFS]  69.09,24.64 0 top
U$6  [#3#3V#0]  27.81,40.39 0 bottom
U$7  [#BYP#0]  18.54,28.32 0 bottom
U$8  [#GND#0]  32.26,36.32 90 top
U$9  [#MEAS#0]  23.37,14.73 0 bottom
U$10  [SFE_LOGO_FLAME_.2]  134.62,37.46 0 top
U$11  [#0]  8.38,26.54 0 top
U$12  [#VBAT#0]  14.22,26.54 0 bottom
U$13  [MICROMOD_LOGO_.5]  193.93,40.26 0 top
U$14  [#GND#0]  32.26,36.32 90 bottom
U$15  [##INT##0]  34.8,36.7 90 top
U$16  [##INT##0]  34.8,36.7 90 bottom
U$17  [#D0#0]  37.34,37.34 90 top
U$18  [#D0#0]  37.34,37.34 90 bottom
U$19  [QWIIC_CARRIER_#_2X10]  73.03,9.52 0 top
U$20  [#D1#0]  39.88,37.59 90 top
U$21  [#D1#0]  39.88,37.59 90 bottom
U$22  [#CIPO#0]  42.42,35.81 90 top
U$23  [#CIPO#0]  42.42,35.81 90 bottom
U$24  [#COPI#0]  44.96,35.81 90 top
U$25  [#COPI#0]  44.96,35.81 90 bottom
U$26  [#SCK#0]  47.5,36.45 90 top
U$27  [#SCK#0]  47.5,36.45 90 bottom
U$28  [##CS##0]  50.04,37.34 90 top
U$29  [##CS##0]  50.04,37.34 90 bottom
U$30  [RESET0]  17.65,7.37 90 top
U$31  [BOOT0]  26.67,7.75 90 top
U$32  [#0]  14.61,34.67 0 top
U$33  [#GND#0]  12.95,24 0 bottom
U$34  [22220]  34.04,12.7 0 top
U$35  [#3#3V#0]  29.72,35.94 90 top
U$36  [#0]  8,24.26 0 top
U$37  [#0]  14.22,30.35 0 top
U$38  [#3#3V#0]  29.72,35.94 90 bottom
U$39  [QWIIC_CARRIER_#_2X10]  49.78,23.37 0 bottom
U$40  [MICROMOD_LOGO_.5]  148.34,25.91 0 bottom
U$41  [CHG0]  122.3,38.61 0 top
U$42  [#3#3V#0]  137.54,40.39 0 bottom
U$43  [#BYP#0]  128.27,28.32 0 bottom
U$44  [SFE_LOGO_FLAME_.2]  24.89,37.46 0 top
U$45  [#MEAS#0]  133.1,14.73 0 bottom
U$46  QWIIC_BOARD_OUTLINESTANDOFF  [QWIIC_BOARD_MOUNT_SMD_STANDOFFS]  178.82,24.64 0 top
U$47  [3V30]  122.3,40.51 0 top
U$48  [#3#3V_EN#0]  132.33,23.37 0 bottom
U$49  [#GND#0]  141.99,36.32 90 top
U$50  [#GND#0]  141.99,36.32 90 bottom
U$51  [#CIPO#0]  152.15,35.81 90 top
U$52  [#CIPO#0]  152.15,35.81 90 bottom
U$53  [#COPI#0]  154.69,35.81 90 top
U$54  [#COPI#0]  154.69,35.81 90 bottom
U$55  [#SCK#0]  157.23,36.45 90 top
U$56  [#SCK#0]  157.23,36.45 90 bottom
U$57  [#VBAT#0]  123.95,26.54 0 bottom
U$58  [#GND#0]  122.68,24 0 bottom
U$59  [#0]  118.11,26.54 0 top
U$60  [#0]  124.33,34.67 0 top
U$61  [#0]  117.73,24.26 0 top
U$62  [#0]  123.95,30.35 0 top
U$63  [#D0#0]  147.07,37.34 90 top
U$64  [#D0#0]  147.07,37.34 90 bottom
U$65  [#D1#0]  149.61,37.59 90 top
U$66  [#D1#0]  149.61,37.59 90 bottom
U$67  [MICROMOD_LOGO_.5]  84.2,40.26 0 top
U$68  [MICROMOD_LOGO_.5]  38.61,25.91 0 bottom
U$69  [RESET0]  127.38,7.37 90 top
U$70  [BOOT0]  136.4,7.75 90 top
U$71  [22220]  143.76,12.7 0 top
U$72  [#3#3V#0]  139.45,35.94 90 top
U$73  [#3#3V#0]  139.45,35.94 90 bottom
U$74  [##CS##0]  159.77,37.34 90 top
U$75  [##CS##0]  159.77,37.34 90 bottom
U$76  [##INT##0]  144.53,36.7 90 top
U$77  [##INT##0]  144.53,36.7 90 bottom
U$78  QWIIC_BOARD_OUTLINESTANDOFF  [QWIIC_BOARD_MOUNT_SMD_STANDOFFS]  209.3,24.64 0 top
U$79  [QWIIC_CARRIER_#_2X10]  182.75,9.52 0 top
U$80  [QWIIC_CARRIER_#_2X10]  159.51,23.37 0 bottom
U$81  [SFE_LOGO_FLAME_.2]  24.89,73.53 0 top
U$82  [MICROMOD_LOGO_.5]  84.2,76.33 0 top
U$83  [MICROMOD_LOGO_.5]  38.61,61.98 0 bottom
U$84  [CHG0]  12.57,74.68 0 top
U$85  [#3#3V#0]  27.81,76.45 0 bottom
U$86  [#BYP#0]  18.54,64.39 0 bottom
U$87  [#MEAS#0]  23.37,50.8 0 bottom
U$88  QWIIC_BOARD_OUTLINESTANDOFF  [QWIIC_BOARD_MOUNT_SMD_STANDOFFS]  69.09,60.71 0 top
U$89  [3V30]  12.57,76.58 0 top
U$90  [#3#3V_EN#0]  22.61,59.44 0 bottom
U$91  [#GND#0]  32.26,72.39 90 top
U$92  [#GND#0]  32.26,72.39 90 bottom
U$93  [#CIPO#0]  42.42,71.88 90 top
U$94  [#CIPO#0]  42.42,71.88 90 bottom
U$95  [#COPI#0]  44.96,71.88 90 top
U$96  [#COPI#0]  44.96,71.88 90 bottom
U$97  [#SCK#0]  47.5,72.52 90 top
U$98  [#SCK#0]  47.5,72.52 90 bottom
U$99  [#VBAT#0]  14.22,62.61 0 bottom
U$100  [#GND#0]  12.95,60.07 0 bottom
U$101  [#0]  8.38,62.61 0 top
U$102  [#0]  14.61,70.74 0 top
U$103  [#0]  8,60.32 0 top
U$104  [#0]  14.22,66.42 0 top
U$105  [#D0#0]  37.34,73.41 90 top
U$106  [#D0#0]  37.34,73.41 90 bottom
U$107  [#D1#0]  39.88,73.66 90 top
U$108  [#D1#0]  39.88,73.66 90 bottom
U$109  [RESET0]  17.65,43.43 90 top
U$110  [BOOT0]  26.67,43.81 90 top
U$111  [22220]  34.04,48.77 0 top
U$112  [#3#3V#0]  29.72,72.01 90 top
U$113  [#3#3V#0]  29.72,72.01 90 bottom
U$114  [##CS##0]  50.04,73.41 90 top
U$115  [##CS##0]  50.04,73.41 90 bottom
U$116  [##INT##0]  34.8,72.77 90 top
U$117  [##INT##0]  34.8,72.77 90 bottom
U$118  QWIIC_BOARD_OUTLINESTANDOFF  [QWIIC_BOARD_MOUNT_SMD_STANDOFFS]  99.57,60.71 0 top
U$119  [QWIIC_CARRIER_#_2X10]  73.03,45.59 0 top
U$120  [QWIIC_CARRIER_#_2X10]  49.78,59.44 0 bottom
U$121  [SFE_LOGO_FLAME_.2]  134.62,73.53 0 top
U$122  [MICROMOD_LOGO_.5]  193.93,76.33 0 top
U$123  [MICROMOD_LOGO_.5]  148.34,61.98 0 bottom
U$124  [CHG0]  122.3,74.68 0 top
U$125  [#3#3V#0]  137.54,76.45 0 bottom
U$126  [#BYP#0]  128.27,64.39 0 bottom
U$127  [#MEAS#0]  133.1,50.8 0 bottom
U$128  QWIIC_BOARD_OUTLINESTANDOFF  [QWIIC_BOARD_MOUNT_SMD_STANDOFFS]  178.82,60.71 0 top
U$129  [3V30]  122.3,76.58 0 top
U$130  [#3#3V_EN#0]  132.33,59.44 0 bottom
U$131  [#GND#0]  141.99,72.39 90 top
U$132  [#GND#0]  141.99,72.39 90 bottom
U$133  [#CIPO#0]  152.15,71.88 90 top
U$134  [#CIPO#0]  152.15,71.88 90 bottom
U$135  [#COPI#0]  154.69,71.88 90 top
U$136  [#COPI#0]  154.69,71.88 90 bottom
U$137  [#SCK#0]  157.23,72.52 90 top
U$138  [#SCK#0]  157.23,72.52 90 bottom
U$139  [#VBAT#0]  123.95,62.61 0 bottom
U$140  [#GND#0]  122.68,60.07 0 bottom
U$141  [#0]  118.11,62.61 0 top
U$142  [#0]  124.33,70.74 0 top
U$143  [#0]  117.73,60.32 0 top
U$144  [#0]  123.95,66.42 0 top
U$145  [#D0#0]  147.07,73.41 90 top
U$146  [#D0#0]  147.07,73.41 90 bottom
U$147  [#D1#0]  149.61,73.66 90 top
U$148  [#D1#0]  149.61,73.66 90 bottom
U$149  [RESET0]  127.38,43.43 90 top
U$150  [BOOT0]  136.4,43.81 90 top
U$151  [22220]  143.76,48.77 0 top
U$152  [#3#3V#0]  139.45,72.01 90 top
U$153  [#3#3V#0]  139.45,72.01 90 bottom
U$154  [##CS##0]  159.77,73.41 90 top
U$155  [##CS##0]  159.77,73.41 90 bottom
U$156  [##INT##0]  144.53,72.77 90 top
U$157  [##INT##0]  144.53,72.77 90 bottom
U$158  QWIIC_BOARD_OUTLINESTANDOFF  [QWIIC_BOARD_MOUNT_SMD_STANDOFFS]  209.3,60.71 0 top
U$159  [QWIIC_CARRIER_#_2X10]  182.75,45.59 0 top
U$160  [QWIIC_CARRIER_#_2X10]  159.51,59.44 0 bottom
U$161  [SFE_LOGO_FLAME_.2]  24.89,109.6 0 top
U$162  [MICROMOD_LOGO_.5]  84.2,112.4 0 top
U$163  [MICROMOD_LOGO_.5]  38.61,98.04 0 bottom
U$164  [CHG0]  12.57,110.74 0 top
U$165  [#3#3V#0]  27.81,112.52 0 bottom
U$166  [#BYP#0]  18.54,100.46 0 bottom
U$167  [#MEAS#0]  23.37,86.87 0 bottom
U$168  QWIIC_BOARD_OUTLINESTANDOFF  [QWIIC_BOARD_MOUNT_SMD_STANDOFFS]  69.09,96.77 0 top
U$169  [3V30]  12.57,112.65 0 top
U$170  [#3#3V_EN#0]  22.61,95.5 0 bottom
U$171  [#GND#0]  32.26,108.46 90 top
U$172  [#GND#0]  32.26,108.46 90 bottom
U$173  [#CIPO#0]  42.42,107.95 90 top
U$174  [#CIPO#0]  42.42,107.95 90 bottom
U$175  [#COPI#0]  44.96,107.95 90 top
U$176  [#COPI#0]  44.96,107.95 90 bottom
U$177  [#SCK#0]  47.5,108.59 90 top
U$178  [#SCK#0]  47.5,108.59 90 bottom
U$179  [#VBAT#0]  14.22,98.68 0 bottom
U$180  [#GND#0]  12.95,96.14 0 bottom
U$181  [#0]  8.38,98.68 0 top
U$182  [#0]  14.61,106.81 0 top
U$183  [#0]  8,96.39 0 top
U$184  [#0]  14.22,102.49 0 top
U$185  [#D0#0]  37.34,109.47 90 top
U$186  [#D0#0]  37.34,109.47 90 bottom
U$187  [#D1#0]  39.88,109.73 90 top
U$188  [#D1#0]  39.88,109.73 90 bottom
U$189  [RESET0]  17.65,79.5 90 top
U$190  [BOOT0]  26.67,79.88 90 top
U$191  [22220]  34.04,84.84 0 top
U$192  [#3#3V#0]  29.72,108.08 90 top
U$193  [#3#3V#0]  29.72,108.08 90 bottom
U$194  [##CS##0]  50.04,109.47 90 top
U$195  [##CS##0]  50.04,109.47 90 bottom
U$196  [##INT##0]  34.8,108.84 90 top
U$197  [##INT##0]  34.8,108.84 90 bottom
U$198  QWIIC_BOARD_OUTLINESTANDOFF  [QWIIC_BOARD_MOUNT_SMD_STANDOFFS]  99.57,96.77 0 top
U$199  [QWIIC_CARRIER_#_2X10]  73.03,81.66 0 top
U$200  [QWIIC_CARRIER_#_2X10]  49.78,95.5 0 bottom
U$201  [SFE_LOGO_FLAME_.2]  134.62,109.6 0 top
U$202  [MICROMOD_LOGO_.5]  193.93,112.4 0 top
U$203  [MICROMOD_LOGO_.5]  148.34,98.04 0 bottom
U$204  [CHG0]  122.3,110.74 0 top
U$205  [#3#3V#0]  137.54,112.52 0 bottom
U$206  [#BYP#0]  128.27,100.46 0 bottom
U$207  [#MEAS#0]  133.1,86.87 0 bottom
U$208  QWIIC_BOARD_OUTLINESTANDOFF  [QWIIC_BOARD_MOUNT_SMD_STANDOFFS]  178.82,96.77 0 top
U$209  [3V30]  122.3,112.65 0 top
U$210  [#3#3V_EN#0]  132.33,95.5 0 bottom
U$211  [#GND#0]  141.99,108.46 90 top
U$212  [#GND#0]  141.99,108.46 90 bottom
U$213  [#CIPO#0]  152.15,107.95 90 top
U$214  [#CIPO#0]  152.15,107.95 90 bottom
U$215  [#COPI#0]  154.69,107.95 90 top
U$216  [#COPI#0]  154.69,107.95 90 bottom
U$217  [#SCK#0]  157.23,108.59 90 top
U$218  [#SCK#0]  157.23,108.59 90 bottom
U$219  [#VBAT#0]  123.95,98.68 0 bottom
U$220  [#GND#0]  122.68,96.14 0 bottom
U$221  [#0]  118.11,98.68 0 top
U$222  [#0]  124.33,106.81 0 top
U$223  [#0]  117.73,96.39 0 top
U$224  [#0]  123.95,102.49 0 top
U$225  [#D0#0]  147.07,109.47 90 top
U$226  [#D0#0]  147.07,109.47 90 bottom
U$227  [#D1#0]  149.61,109.73 90 top
U$228  [#D1#0]  149.61,109.73 90 bottom
U$229  [RESET0]  127.38,79.5 90 top
U$230  [BOOT0]  136.4,79.88 90 top
U$231  [22220]  143.76,84.84 0 top
U$232  [#3#3V#0]  139.45,108.08 90 top
U$233  [#3#3V#0]  139.45,108.08 90 bottom
U$234  [##CS##0]  159.77,109.47 90 top
U$235  [##CS##0]  159.77,109.47 90 bottom
U$236  [##INT##0]  144.53,108.84 90 top
U$237  [##INT##0]  144.53,108.84 90 bottom
U$238  QWIIC_BOARD_OUTLINESTANDOFF  [QWIIC_BOARD_MOUNT_SMD_STANDOFFS]  209.3,96.77 0 top
U$239  [QWIIC_CARRIER_#_2X10]  182.75,81.66 0 top
U$240  [QWIIC_CARRIER_#_2X10]  159.51,95.5 0 bottom
U$241  [SFE_LOGO_FLAME_.2]  24.89,145.67 0 top
U$242  [MICROMOD_LOGO_.5]  84.2,148.46 0 top
U$243  [MICROMOD_LOGO_.5]  38.61,134.11 0 bottom
U$244  [CHG0]  12.57,146.81 0 top
U$245  [#3#3V#0]  27.81,148.59 0 bottom
U$246  [#BYP#0]  18.54,136.53 0 bottom
U$247  [#MEAS#0]  23.37,122.94 0 bottom
U$248  QWIIC_BOARD_OUTLINESTANDOFF  [QWIIC_BOARD_MOUNT_SMD_STANDOFFS]  69.09,132.84 0 top
U$249  [3V30]  12.57,148.72 0 top
U$250  [#3#3V_EN#0]  22.61,131.57 0 bottom
U$251  [#GND#0]  32.26,144.53 90 top
U$252  [#GND#0]  32.26,144.53 90 bottom
U$253  [#CIPO#0]  42.42,144.02 90 top
U$254  [#CIPO#0]  42.42,144.02 90 bottom
U$255  [#COPI#0]  44.96,144.02 90 top
U$256  [#COPI#0]  44.96,144.02 90 bottom
U$257  [#SCK#0]  47.5,144.65 90 top
U$258  [#SCK#0]  47.5,144.65 90 bottom
U$259  [#VBAT#0]  14.22,134.75 0 bottom
U$260  [#GND#0]  12.95,132.21 0 bottom
U$261  [#0]  8.38,134.75 0 top
U$262  [#0]  14.61,142.88 0 top
U$263  [#0]  8,132.46 0 top
U$264  [#0]  14.22,138.56 0 top
U$265  [#D0#0]  37.34,145.54 90 top
U$266  [#D0#0]  37.34,145.54 90 bottom
U$267  [#D1#0]  39.88,145.8 90 top
U$268  [#D1#0]  39.88,145.8 90 bottom
U$269  [RESET0]  17.65,115.57 90 top
U$270  [BOOT0]  26.67,115.95 90 top
U$271  [22220]  34.04,120.9 0 top
U$272  [#3#3V#0]  29.72,144.15 90 top
U$273  [#3#3V#0]  29.72,144.15 90 bottom
U$274  [##CS##0]  50.04,145.54 90 top
U$275  [##CS##0]  50.04,145.54 90 bottom
U$276  [##INT##0]  34.8,144.91 90 top
U$277  [##INT##0]  34.8,144.91 90 bottom
U$278  QWIIC_BOARD_OUTLINESTANDOFF  [QWIIC_BOARD_MOUNT_SMD_STANDOFFS]  99.57,132.84 0 top
U$279  [QWIIC_CARRIER_#_2X10]  73.03,117.73 0 top
U$280  [QWIIC_CARRIER_#_2X10]  49.78,131.57 0 bottom
U$281  [SFE_LOGO_FLAME_.2]  134.62,145.67 0 top
U$282  [MICROMOD_LOGO_.5]  193.93,148.46 0 top
U$283  [MICROMOD_LOGO_.5]  148.34,134.11 0 bottom
U$284  [CHG0]  122.3,146.81 0 top
U$285  [#3#3V#0]  137.54,148.59 0 bottom
U$286  [#BYP#0]  128.27,136.53 0 bottom
U$287  [#MEAS#0]  133.1,122.94 0 bottom
U$288  QWIIC_BOARD_OUTLINESTANDOFF  [QWIIC_BOARD_MOUNT_SMD_STANDOFFS]  178.82,132.84 0 top
U$289  [3V30]  122.3,148.72 0 top
U$290  [#3#3V_EN#0]  132.33,131.57 0 bottom
U$291  [#GND#0]  141.99,144.53 90 top
U$292  [#GND#0]  141.99,144.53 90 bottom
U$293  [#CIPO#0]  152.15,144.02 90 top
U$294  [#CIPO#0]  152.15,144.02 90 bottom
U$295  [#COPI#0]  154.69,144.02 90 top
U$296  [#COPI#0]  154.69,144.02 90 bottom
U$297  [#SCK#0]  157.23,144.65 90 top
U$298  [#SCK#0]  157.23,144.65 90 bottom
U$299  [#VBAT#0]  123.95,134.75 0 bottom
U$300  [#GND#0]  122.68,132.21 0 bottom
U$301  [#0]  118.11,134.75 0 top
U$302  [#0]  124.33,142.88 0 top
U$303  [#0]  117.73,132.46 0 top
U$304  [#0]  123.95,138.56 0 top
U$305  [#D0#0]  147.07,145.54 90 top
U$306  [#D0#0]  147.07,145.54 90 bottom
U$307  [#D1#0]  149.61,145.8 90 top
U$308  [#D1#0]  149.61,145.8 90 bottom
U$309  [RESET0]  127.38,115.57 90 top
U$310  [BOOT0]  136.4,115.95 90 top
U$311  [22220]  143.76,120.9 0 top
U$312  [#3#3V#0]  139.45,144.15 90 top
U$313  [#3#3V#0]  139.45,144.15 90 bottom
U$314  [##CS##0]  159.77,145.54 90 top
U$315  [##CS##0]  159.77,145.54 90 bottom
U$316  [##INT##0]  144.53,144.91 90 top
U$317  [##INT##0]  144.53,144.91 90 bottom
U$318  QWIIC_BOARD_OUTLINESTANDOFF  [QWIIC_BOARD_MOUNT_SMD_STANDOFFS]  209.3,132.84 0 top
U$319  [QWIIC_CARRIER_#_2X10]  182.75,117.73 0 top
U$320  [QWIIC_CARRIER_#_2X10]  159.51,131.57 0 bottom

## Library data of the parts
BYP BYP1-BYP7 JP1-JP16 MEAS MEAS1-MEAS7 = SparkFun-Jumpers
C1 C6 C18 C26 C34 C42 C50 C58 = SparkFun-Capacitors; PROD_ID: CAP-00810
C2 C7 C19 C27 C35 C43 C51 C59 = SparkFun-Capacitors; PROD_ID: CAP-00811
C3 C4 C15 C16 C23 C24 C31 C32 C39 C40 C47 C48 C55 C56 C63 C64 = SparkFun-Capacitors; PROD_ID: CAP-14106
C5 C11 C13 C14 C17 C22 C25 C30 C33 C38 C41 C46 C49 C54 C57 C62 = SparkFun-Capacitors; PROD_ID: CAP-07822
C8 C9 C20 C28 C36 C44 C52 C60 = SparkFun-Capacitors; PROD_ID: CAP-11015
C10 C12 C21 C29 C37 C45 C53 C61 = SparkFun-Capacitors; PROD_ID: CAP-00868
D1 D7 D12 D17 D22 D27 D32 D37 = SparkFun-DiscreteSemi; PROD_ID: DIO-11284
D2 D6 D11 D16 D21 D26 D31 D36 = SparkFun-LED; PROD_ID: DIO-00819
D3 D5 D8 D10 D13 D15 D18 D20 D23 D25 D28 D30 D33 D35 D38 D40 = SparkFun-DiscreteSemi; PROD_ID: DIO-14072
D4 D9 D14 D19 D24 D29 D34 D39 = SparkFun-LED; PROD_ID: DIO-09003
E$1-E$4 FD1-FD32 LOGO1-LOGO24 U$10 U$44 U$81 U$121 U$161 U$201 U$241 U$281 = SparkFun-Aesthetics
E$5 E$6 = SparkFun-Retired
F1-F8 = SparkFun-Fuses; PROD_ID: RES-14313
H1-H4 H6-H9 H11-H14 H16-H19 H21-H24 H26-H29 H31-H34 H36-H39 = SparkFun-Hardware
H5 H10 H15 H20 H25 H30 H35 H40 = SparkFun-Hardware; PROD_ID: HW-14899
J1 J7 J14 J22 J29 J36 J43 J50 = SparkFun-Connectors; PROD_ID: CONN-14122
J2 J9 J17 J24 J31 J38 J45 J52 = SparkFun-Connectors; PROD_ID: CONN-13694
J3 J10 J18 J25 J32 J39 J46 J53 = SparkFun-Connectors; PROD_ID: CONN-11443; SF_ID: PRT-08612
J4 J6 J11 J13 J19 J21 J26 J28 J33 J35 J40 J42 J47 J49 J54 J56 TP1-TP16 = SparkFun-Connectors
J5 J12 J20 J27 J34 J41 J48 J55 = SparkFun-Connectors; PROD_ID: CONN-14483
J8 J15 J16 J23 J30 J37 J44 J51 = SparkFun-MicroMod; PROD_ID: CONN-14877
R1 R10 R17 R23 R29 R35 R41 R47 = SparkFun-Resistors; PROD_ID: RES-08272
R2 R3 R6 R7 R13 R14 R19 R20 R25 R26 R31 R32 R37 R38 R43 R44 = SparkFun-Resistors; PROD_ID: RES-12083
R4 R8 R11 R12 R15 R18 R21 R24 R27 R30 R33 R36 R39 R42 R45 R48 = SparkFun-Resistors; PROD_ID: RES-07856
R5 R9 R16 R22 R28 R34 R40 R46 = SparkFun-Resistors; PROD_ID: RES-07828
S1-S16 = SparkFun-Switches; PROD_ID: SWCH-14139
U1 U3 U6 U8 U10 U12 U14 U16 = SparkFun-IC-Power; PROD_ID: IC-09995
U2 U4 U5 U7 U9 U11 U13 U15 = SparkFun-IC-Power; PROD_ID: VREG-14094
U$1 U$3 U$4 U$6-U$9 U$11 U$12 U$14-U$35 U$38 U$39 U$41-U$43 U$45 U$47-U$60 U$63-U$66 U$69-U$77 U$79 U$80 U$84-U$87 U$89-U$102 U$105-U$117 U$119 U$120 U$124-U$127 U$129-U$142 U$145-U$157 U$159 U$160 U$164-U$167 U$169-U$182 U$185-U$197 U$199 U$200 U$204-U$207 U$209-U$222 U$225-U$237 U$239 U$240 U$244-U$247 U$249-U$262 U$265-U$277 U$279 U$280 U$284-U$287 U$289-U$302 U$305-U$317 U$319 U$320 = output
U$2 U$5 U$46 U$78 U$88 U$118 U$128 U$158 U$168 U$198 U$208 U$238 U$248 U$278 U$288 U$318 = SparkFun-Boards
U$13 U$40 U$67 U$68 U$82 U$83 U$122 U$123 U$162 U$163 U$202 U$203 U$242 U$243 U$282 U$283 = SparkFun-MicroMod
U$36 U$37 U$61 U$62 U$103 U$104 U$143 U$144 U$183 U$184 U$223 U$224 U$263 U$264 U$303 U$304 = buzzard_labels (1)

## Nets
3.3V: J2.2 J5.2 J6.1 J15.2 J15.74 JP4.2 MEAS.2 MEAS.4
3.3V1: J8.2 J8.74 J9.2 J12.2 J13.1 JP1.2 MEAS1.2 MEAS1.4
3.3V2: J16.2 J16.74 J17.2 J20.2 J21.1 JP3.2 MEAS2.2 MEAS2.4
3.3V3: J23.2 J23.74 J24.2 J27.2 J28.1 JP7.2 MEAS3.2 MEAS3.4
3.3V4: J30.2 J30.74 J31.2 J34.2 J35.1 JP9.2 MEAS4.2 MEAS4.4
3.3V5: J37.2 J37.74 J38.2 J41.2 J42.1 JP11.2 MEAS5.2 MEAS5.4
3.3V6: J44.2 J44.74 J45.2 J48.2 J49.1 JP13.2 MEAS6.2 MEAS6.4
3.3V7: J51.2 J51.74 J52.2 J55.2 J56.1 JP15.2 MEAS7.2 MEAS7.4
3.3V_EN: J15.4 JP6.1
3.3V_EN1: J8.4 JP2.1
3.3V_EN2: J16.4 JP5.1
3.3V_EN3: J23.4 JP8.1
3.3V_EN4: J30.4 JP10.1
3.3V_EN5: J37.4 JP12.1
3.3V_EN6: J44.4 JP14.1
3.3V_EN7: J51.4 JP16.1
!BOOT!: J15.11 S2.3 S2.4
!BOOT!1: J8.11 S4.3 S4.4
!BOOT!2: J16.11 S6.3 S6.4
!BOOT!3: J23.11 S8.3 S8.4
!BOOT!4: J30.11 S10.3 S10.4
!BOOT!5: J37.11 S12.3 S12.4
!BOOT!6: J44.11 S14.3 S14.4
!BOOT!7: J51.11 S16.3 S16.4
!RESET!: J15.6 S1.3 S1.4
!RESET!1: J8.6 S3.3 S3.4
!RESET!2: J16.6 S5.3 S5.4
!RESET!3: J23.6 S7.3 S7.4
!RESET!4: J30.6 S9.3 S9.4
!RESET!5: J37.6 S11.3 S11.4
!RESET!6: J44.6 S13.3 S13.4
!RESET!7: J51.6 S15.3 S15.4
D0: J6.4 J15.10
D1: J6.5 J15.18
D2: J8.10 J13.4
D3: J8.18 J13.5
D4: J16.10 J21.4
D5: J16.18 J21.5
D6: J23.10 J28.4
D7: J23.18 J28.5
D8: J30.10 J35.4
D9: J30.18 J35.5
D10: J37.10 J42.4
D11: J37.18 J42.5
D12: J44.10 J49.4
D13: J44.18 J49.5
D14: J51.10 J56.4
D15: J51.18 J56.5
GND: C1.2 C2.- C3.2 C4.2 C9.2 C10.2 C11.2 C13.2 D1.A D2.C H5.1 J1.GND J1.GND2 J2.1 J3.1 J4.2 J5.1 J6.2 J15.1 J15.7 J15.33 J15.36 J15.39 J15.45 J15.75 R1.1 R2.1 R3.1 S1.1 S1.2 S2.1 S2.2 U1.2 U5.4 U5.EP
GND1: C5.2 C6.2 C7.- C8.2 C12.2 C14.2 C15.2 C16.2 D6.C D7.A H10.1 J7.GND J7.GND2 J8.1 J8.7 J8.33 J8.36 J8.39 J8.45 J8.75 J9.1 J10.1 J11.2 J12.1 J13.2 R6.1 R7.1 R10.1 S3.1 S3.2 S4.1 S4.2 U2.4 U2.EP U3.2
GND2: C17.2 C18.2 C19.- C20.2 C21.2 C22.2 C23.2 C24.2 D11.C D12.A H15.1 J14.GND J14.GND2 J16.1 J16.7 J16.33 J16.36 J16.39 J16.45 J16.75 J17.1 J18.1 J19.2 J20.1 J21.2 R13.1 R14.1 R17.1 S5.1 S5.2 S6.1 S6.2 U4.4 U4.EP U6.2
GND3: C25.2 C26.2 C27.- C28.2 C29.2 C30.2 C31.2 C32.2 D16.C D17.A H20.1 J22.GND J22.GND2 J23.1 J23.7 J23.33 J23.36 J23.39 J23.45 J23.75 J24.1 J25.1 J26.2 J27.1 J28.2 R19.1 R20.1 R23.1 S7.1 S7.2 S8.1 S8.2 U7.4 U7.EP U8.2
GND4: C33.2 C34.2 C35.- C36.2 C37.2 C38.2 C39.2 C40.2 D21.C D22.A H25.1 J29.GND J29.GND2 J30.1 J30.7 J30.33 J30.36 J30.39 J30.45 J30.75 J31.1 J32.1 J33.2 J34.1 J35.2 R25.1 R26.1 R29.1 S9.1 S9.2 S10.1 S10.2 U9.4 U9.EP U10.2
GND5: C41.2 C42.2 C43.- C44.2 C45.2 C46.2 C47.2 C48.2 D26.C D27.A H30.1 J36.GND J36.GND2 J37.1 J37.7 J37.33 J37.36 J37.39 J37.45 J37.75 J38.1 J39.1 J40.2 J41.1 J42.2 R31.1 R32.1 R35.1 S11.1 S11.2 S12.1 S12.2 U11.4 U11.EP U12.2
GND6: C49.2 C50.2 C51.- C52.2 C53.2 C54.2 C55.2 C56.2 D31.C D32.A H35.1 J43.GND J43.GND2 J44.1 J44.7 J44.33 J44.36 J44.39 J44.45 J44.75 J45.1 J46.1 J47.2 J48.1 J49.2 R37.1 R38.1 R41.1 S13.1 S13.2 S14.1 S14.2 U13.4 U13.EP U14.2
GND7: C57.2 C58.2 C59.- C60.2 C61.2 C62.2 C63.2 C64.2 D36.C D37.A H40.1 J50.GND J50.GND2 J51.1 J51.7 J51.33 J51.36 J51.39 J51.45 J51.75 J52.1 J53.1 J54.2 J55.1 J56.2 R43.1 R44.1 R47.1 S15.1 S15.2 S16.1 S16.2 U15.4 U15.EP U16.2
I2C_!INT!: J6.3 J15.16
I2C_!INT!1: J8.16 J13.3
I2C_!INT!2: J16.16 J21.3
I2C_!INT!3: J23.16 J28.3
I2C_!INT!4: J30.16 J35.3
I2C_!INT!5: J37.16 J42.3
I2C_!INT!6: J44.16 J49.3
I2C_!INT!7: J51.16 J56.3
N$1: C9.1 C10.1 C11.1 MEAS.1 MEAS.3 U5.1
N$2: R1.2 U1.5
N$3: D4.C R4.1
N$4: JP4.1 R11.2
N$5: J7.A5 R6.2
N$6: D2.A R11.1
N$7: J7.B5 R7.2
N$8: R4.2 U1.1
N$9: JP1.1 R8.2
N$10: J1.A5 R2.2
N$11: J1.B5 R3.2
N$12: D6.A R8.1
N$13: C8.1 C12.1 C14.1 MEAS1.1 MEAS1.3 U2.1
N$14: R10.2 U3.5
N$15: D9.C R12.1
N$16: R12.2 U3.1
N$17: J14.A5 R13.2
N$18: J14.B5 R14.2
N$19: JP3.1 R15.2
N$20: D11.A R15.1
N$21: C20.1 C21.1 C22.1 MEAS2.1 MEAS2.3 U4.1
N$22: R17.2 U6.5
N$23: D14.C R18.1
N$24: R18.2 U6.1
N$25: J22.A5 R19.2
N$26: J22.B5 R20.2
N$27: JP7.1 R21.2
N$28: D16.A R21.1
N$29: C28.1 C29.1 C30.1 MEAS3.1 MEAS3.3 U7.1
N$30: R23.2 U8.5
N$31: D19.C R24.1
N$32: R24.2 U8.1
N$33: J29.A5 R25.2
N$34: J29.B5 R26.2
N$35: JP9.1 R27.2
N$36: D21.A R27.1
N$37: C36.1 C37.1 C38.1 MEAS4.1 MEAS4.3 U9.1
N$38: R29.2 U10.5
N$39: D24.C R30.1
N$40: R30.2 U10.1
N$41: J36.A5 R31.2
N$42: J36.B5 R32.2
N$43: JP11.1 R33.2
N$44: D26.A R33.1
N$45: C44.1 C45.1 C46.1 MEAS5.1 MEAS5.3 U11.1
N$46: R35.2 U12.5
N$47: D29.C R36.1
N$48: R36.2 U12.1
N$49: J43.A5 R37.2
N$50: J43.B5 R38.2
N$51: JP13.1 R39.2
N$52: D31.A R39.1
N$53: C52.1 C53.1 C54.1 MEAS6.1 MEAS6.3 U13.1
N$54: R41.2 U14.5
N$55: D34.C R42.1
N$56: R42.2 U14.1
N$57: J50.A5 R43.2
N$58: J50.B5 R44.2
N$59: JP15.1 R45.2
N$60: D36.A R45.1
N$61: C60.1 C61.1 C62.1 MEAS7.1 MEAS7.3 U15.1
N$62: R47.2 U16.5
N$63: D39.C R48.1
N$64: R48.2 U16.1
SCL: J2.4 J5.4 J15.14 TP2.P$1
SCL1: J8.14 J9.4 J12.4 TP4.P$1
SCL2: J16.14 J17.4 J20.4 TP6.P$1
SCL3: J23.14 J24.4 J27.4 TP8.P$1
SCL4: J30.14 J31.4 J34.4 TP10.P$1
SCL5: J37.14 J38.4 J41.4 TP12.P$1
SCL6: J44.14 J45.4 J48.4 TP14.P$1
SCL7: J51.14 J52.4 J55.4 TP16.P$1
SDA: J2.3 J5.3 J15.12 TP1.P$1
SDA1: J8.12 J9.3 J12.3 TP3.P$1
SDA2: J16.12 J17.3 J20.3 TP5.P$1
SDA3: J23.12 J24.3 J27.3 TP7.P$1
SDA4: J30.12 J31.3 J34.3 TP9.P$1
SDA5: J37.12 J38.3 J41.3 TP11.P$1
SDA6: J44.12 J45.3 J48.3 TP13.P$1
SDA7: J51.12 J52.3 J55.3 TP15.P$1
SPI_!CS!: J6.9 J15.55
SPI_!CS!1: J8.55 J13.9
SPI_!CS!2: J16.55 J21.9
SPI_!CS!3: J23.55 J28.9
SPI_!CS!4: J30.55 J35.9
SPI_!CS!5: J37.55 J42.9
SPI_!CS!6: J44.55 J49.9
SPI_!CS!7: J51.55 J56.9
SPI_CIPO: J6.6 J15.61
SPI_CIPO1: J8.61 J13.6
SPI_CIPO2: J16.61 J21.6
SPI_CIPO3: J23.61 J28.6
SPI_CIPO4: J30.61 J35.6
SPI_CIPO5: J37.61 J42.6
SPI_CIPO6: J44.61 J49.6
SPI_CIPO7: J51.61 J56.6
SPI_COPI: J6.7 J15.59
SPI_COPI1: J8.59 J13.7
SPI_COPI2: J16.59 J21.7
SPI_COPI3: J23.59 J28.7
SPI_COPI4: J30.59 J35.7
SPI_COPI5: J37.59 J42.7
SPI_COPI6: J44.59 J49.7
SPI_COPI7: J51.59 J56.7
SPI_SCK: J6.8 J15.57
SPI_SCK1: J8.57 J13.8
SPI_SCK2: J16.57 J21.8
SPI_SCK3: J23.57 J28.8
SPI_SCK4: J30.57 J35.8
SPI_SCK5: J37.57 J42.8
SPI_SCK6: J44.57 J49.8
SPI_SCK7: J51.57 J56.8
USB_D+: J1.A6 J1.B6 J15.3
USB_D+1: J7.A6 J7.B6 J8.3
USB_D+2: J14.A6 J14.B6 J16.3
USB_D+3: J22.A6 J22.B6 J23.3
USB_D+4: J29.A6 J29.B6 J30.3
USB_D+5: J36.A6 J36.B6 J37.3
USB_D+6: J43.A6 J43.B6 J44.3
USB_D+7: J50.A6 J50.B6 J51.3
USB_D-: J1.A7 J1.B7 J15.5
USB_D-1: J7.A7 J7.B7 J8.5
USB_D-2: J14.A7 J14.B7 J16.5
USB_D-3: J22.A7 J22.B7 J23.5
USB_D-4: J29.A7 J29.B7 J30.5
USB_D-5: J36.A7 J36.B7 J37.5
USB_D-6: J43.A7 J43.B7 J44.5
USB_D-7: J50.A7 J50.B7 J51.5
V_BATT: C3.1 D3.A J3.2 J4.1 U1.3
V_BATT1: C15.1 D8.A J10.2 J11.1 U3.3
V_BATT2: C23.1 D13.A J18.2 J19.1 U6.3
V_BATT3: C31.1 D18.A J25.2 J26.1 U8.3
V_BATT4: C39.1 D23.A J32.2 J33.1 U10.3
V_BATT5: C47.1 D28.A J39.2 J40.1 U12.3
V_BATT6: C55.1 D33.A J46.2 J47.1 U14.3
V_BATT7: C63.1 D38.A J53.2 J54.1 U16.3
V_USB: C4.1 D4.A D5.A J1.VBUS1 J1.VBUS2 U1.4
V_USB1: C16.1 D9.A D10.A J7.VBUS1 J7.VBUS2 U3.4
V_USB2: C24.1 D14.A D15.A J14.VBUS1 J14.VBUS2 U6.4
V_USB3: C32.1 D19.A D20.A J22.VBUS1 J22.VBUS2 U8.4
V_USB4: C40.1 D24.A D25.A J29.VBUS1 J29.VBUS2 U10.4
V_USB5: C48.1 D29.A D30.A J36.VBUS1 J36.VBUS2 U12.4
V_USB6: C56.1 D34.A D35.A J43.VBUS1 J43.VBUS2 U14.4
V_USB7: C64.1 D39.A D40.A J50.VBUS1 J50.VBUS2 U16.4
V_USB_1: BYP1.1 D10.C F1.1
V_USB_2: BYP.1 D5.C F2.1
V_USB_3: BYP2.1 D15.C F3.1
V_USB_4: BYP3.1 D20.C F4.1
V_USB_5: BYP4.1 D25.C F5.1
V_USB_6: BYP5.1 D30.C F6.1
V_USB_7: BYP6.1 D35.C F7.1
V_USB_8: BYP7.1 D40.C F8.1
VIN: BYP.2 C1.1 C2.+ C13.1 D3.C F2.2 J15.9 R5.2 U5.8
VIN1: BYP1.2 C5.1 C6.1 C7.+ D8.C F1.2 J8.9 R9.2 U2.8
VIN2: BYP2.2 C17.1 C18.1 C19.+ D13.C F3.2 J16.9 R16.2 U4.8
VIN3: BYP3.2 C25.1 C26.1 C27.+ D18.C F4.2 J23.9 R22.2 U7.8
VIN4: BYP4.2 C33.1 C34.1 C35.+ D23.C F5.2 J30.9 R28.2 U9.8
VIN5: BYP5.2 C41.1 C42.1 C43.+ D28.C F6.2 J37.9 R34.2 U11.8
VIN6: BYP6.2 C49.1 C50.1 C51.+ D33.C F7.2 J44.9 R40.2 U13.8
VIN7: BYP7.2 C57.1 C58.1 C59.+ D38.C F8.2 J51.9 R46.2 U15.8
VREG_EN: D1.C JP6.2 R5.1 U5.5
VREG_EN1: D7.C JP2.2 R9.1 U2.5
VREG_EN2: D12.C JP5.2 R16.1 U4.5
VREG_EN3: D17.C JP8.2 R22.1 U7.5
VREG_EN4: D22.C JP10.2 R28.1 U9.5
VREG_EN5: D27.C JP12.2 R34.1 U11.5
VREG_EN6: D32.C JP14.2 R40.1 U13.5
VREG_EN7: D37.C JP16.2 R46.1 U15.5